# EAGLE board Adaptor485mini_MODIF_PT_ELECROW (EAGLE 6.5.0), part 1 of 2
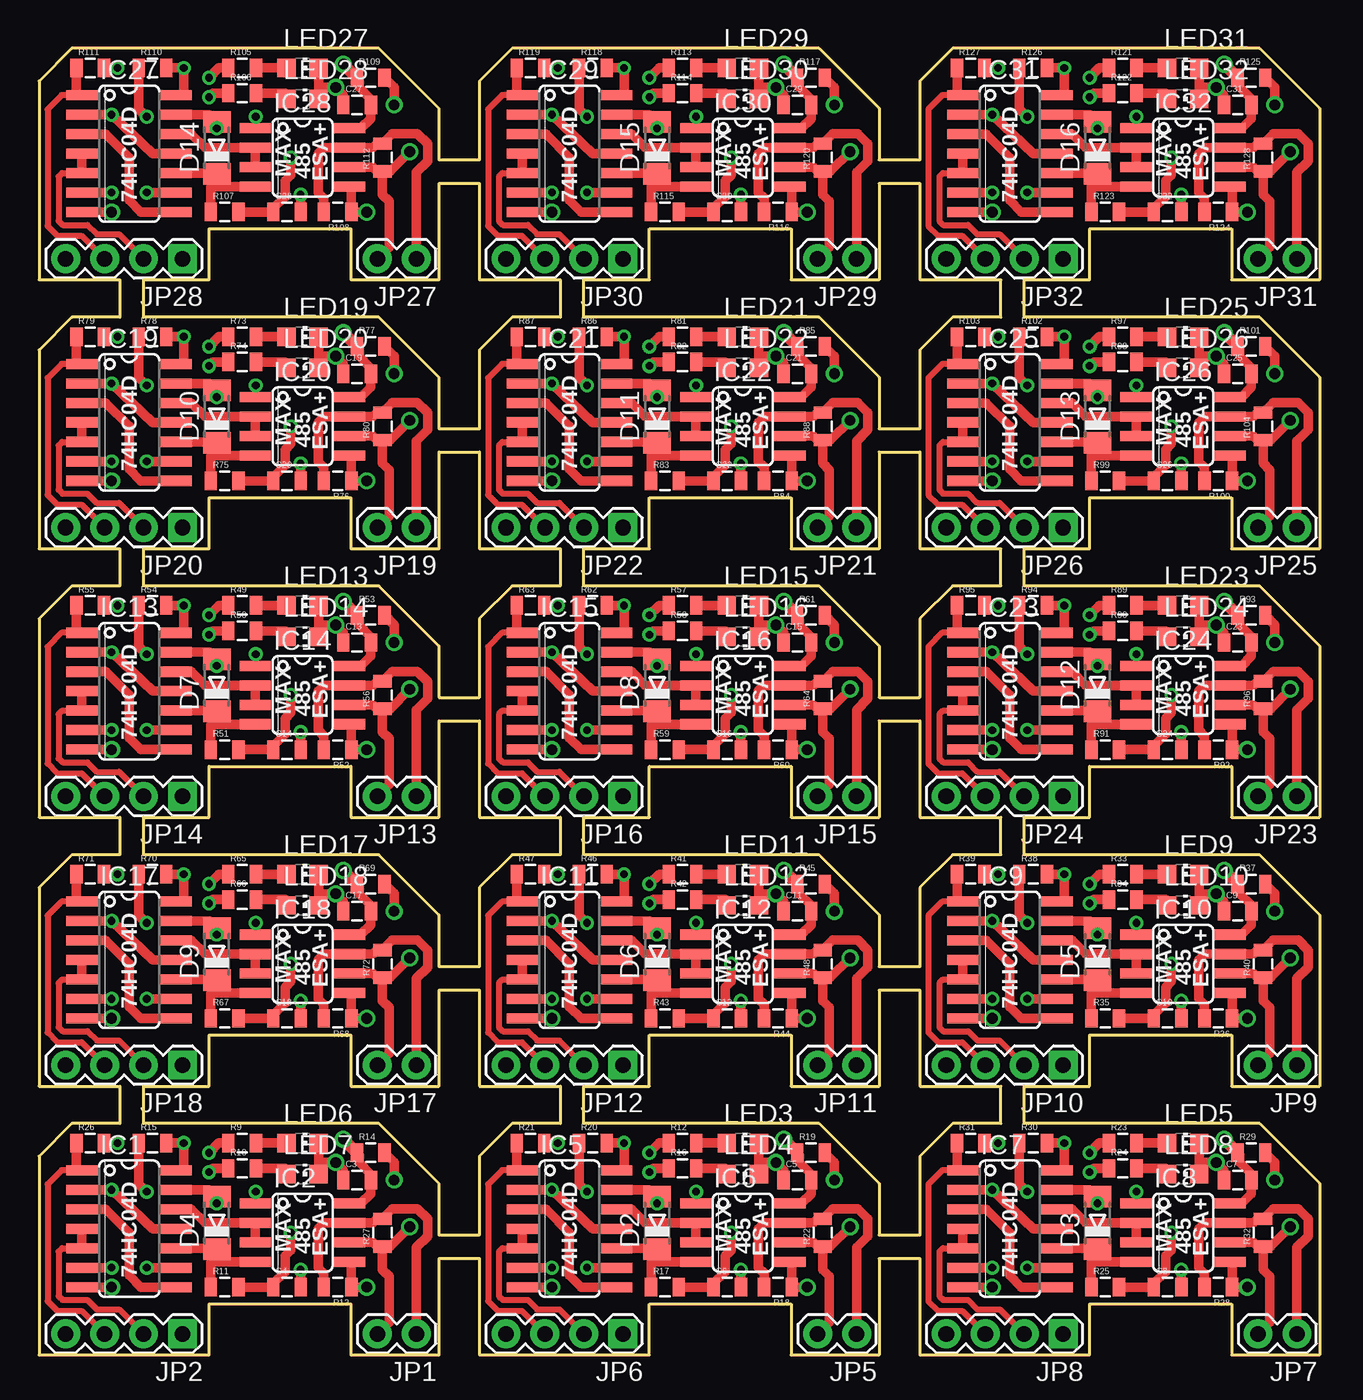
[diagram p0: board, top side]
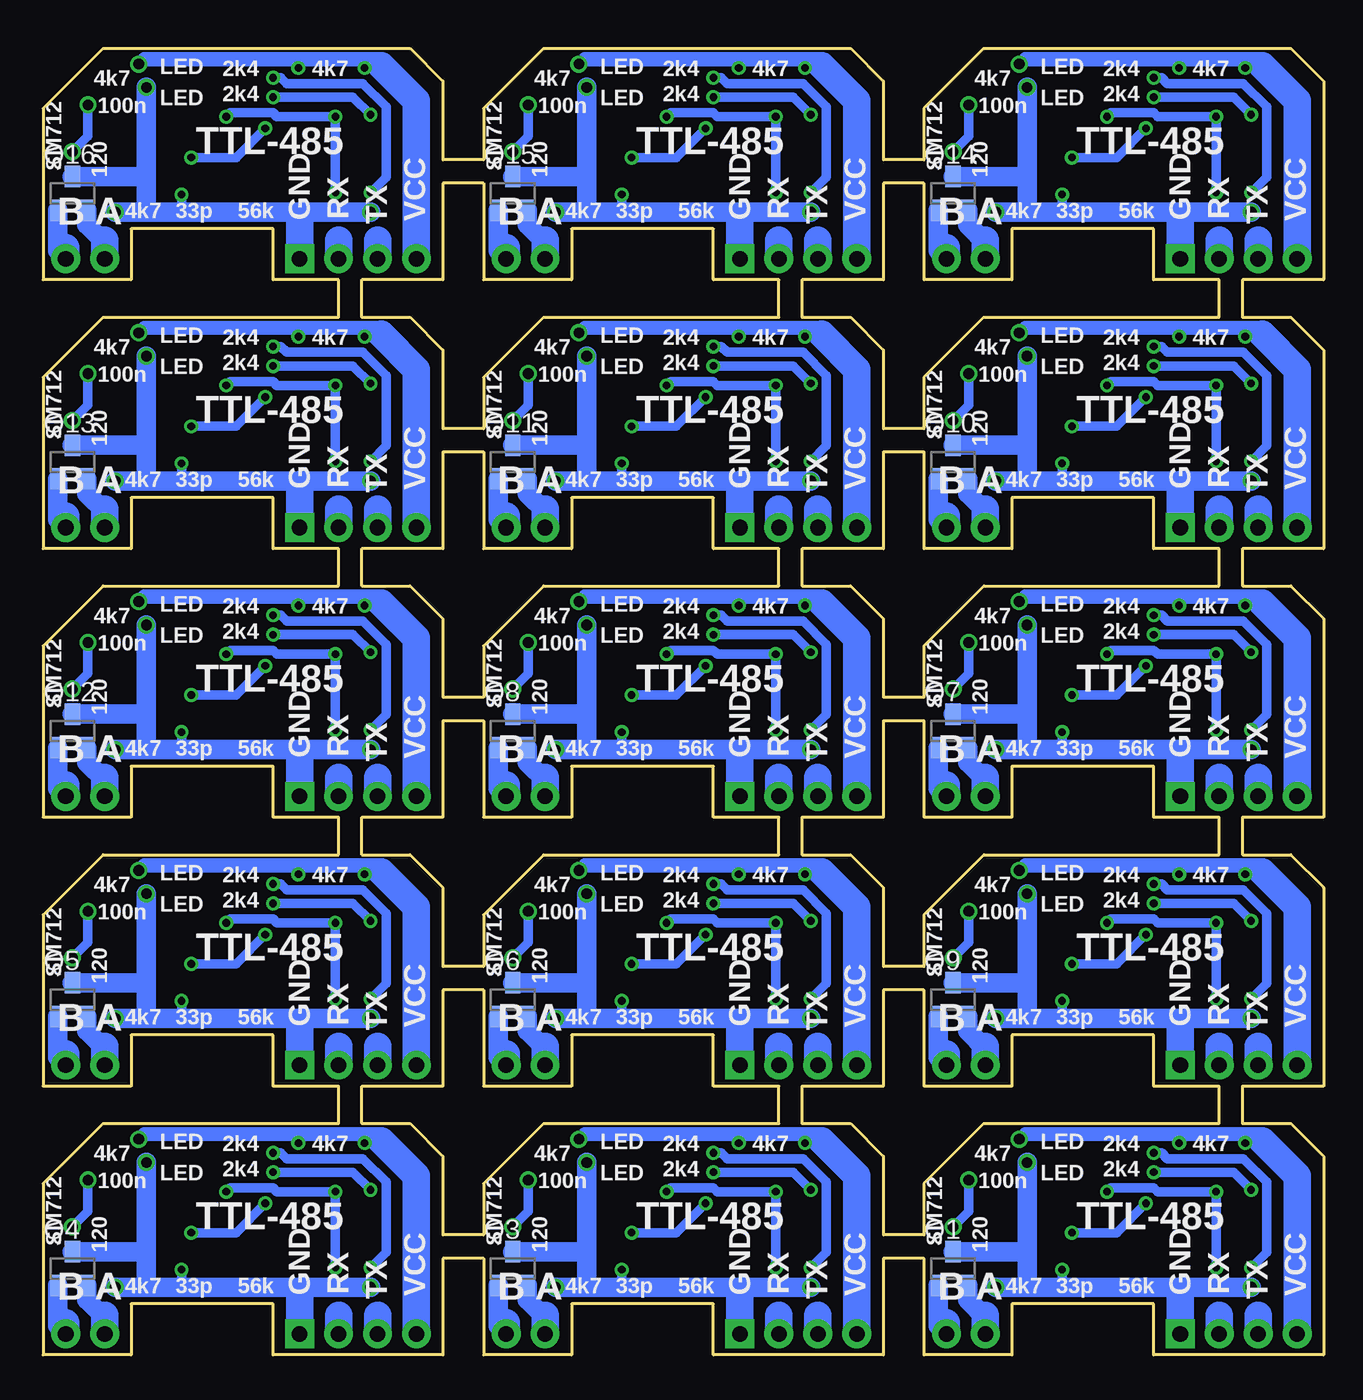
[diagram p1: board, bottom side, seen from below]

Size 83.46 x 85.19 mm. Coordinates in mm from the lower left corner, seen from the top.
Outline: 22.15,15.09 6.81,15.09 6.81,17.53 11.07,17.53 11.07,20.85 20.32,20.85 20.32,17.53 26.06,17.53 26.06,23.8 28.7,23.8 28.7,17.53 33.98,17.53 33.98,15.09 30.84,15.09 28.7,12.95 28.7,7.82 26.06,7.82 26.06,11.18 22.15,15.09
Outline: 5.28,15.09 2.13,15.09 0,12.95 0,0 11.07,0 11.07,3.33 20.32,3.33 20.32,0 26.06,0 26.06,6.3 28.7,6.3 28.7,0 39.78,0 39.78,3.33 49.02,3.33 49.02,0 54.76,0 54.76,6.3 57.4,6.3 57.4,0 68.48,0 68.48,3.33 77.72,3.33 77.72,0 83.46,0 83.46,11.18 79.55,15.09 64.21,15.09 64.21,17.53 68.48,17.53 68.48,20.85 77.72,20.85 77.72,17.53 83.46,17.53 83.46,28.7 79.55,32.61 64.21,32.61 64.21,35.05 68.48,35.05 68.48,38.38 77.72,38.38 77.72,35.05 83.46,35.05 83.46,46.23 79.55,50.14 64.21,50.14 64.21,52.58 68.48,52.58 68.48,55.91 77.72,55.91 77.72,52.58 83.46,52.58 83.46,63.75 79.55,67.67 64.21,67.67 64.21,70.1 68.48,70.1 68.48,73.43 77.72,73.43 77.72,70.1 83.46,70.1 83.46,81.28 79.55,85.19 59.54,85.19 57.4,83.06 57.4,77.93 54.76,77.93 54.76,81.28 50.85,85.19 30.84,85.19 28.7,83.06 28.7,77.93 26.06,77.93 26.06,81.28 22.15,85.19 2.13,85.19 0,83.06 0,70.1 5.28,70.1 5.28,67.67 2.13,67.67 0,65.53 0,52.58 5.28,52.58 5.28,50.14 2.13,50.14 0,48.01 0,35.05 5.28,35.05 5.28,32.61 2.13,32.61 0,30.48 0,17.53 5.28,17.53 5.28,15.09
Outline: 50.85,15.09 35.51,15.09 35.51,17.53 39.78,17.53 39.78,20.85 49.02,20.85 49.02,17.53 54.76,17.53 54.76,23.8 57.4,23.8 57.4,17.53 62.69,17.53 62.69,15.09 59.54,15.09 57.4,12.95 57.4,7.82 54.76,7.82 54.76,11.18 50.85,15.09
Outline: 62.69,32.61 59.54,32.61 57.4,30.48 57.4,25.32 54.76,25.32 54.76,28.7 50.85,32.61 35.51,32.61 35.51,35.05 39.78,35.05 39.78,38.38 49.02,38.38 49.02,35.05 54.76,35.05 54.76,41.35 57.4,41.35 57.4,35.05 62.69,35.05 62.69,32.61
Outline: 33.98,32.61 30.84,32.61 28.7,30.48 28.7,25.32 26.06,25.32 26.06,28.7 22.15,32.61 6.81,32.61 6.81,35.05 11.07,35.05 11.07,38.38 20.32,38.38 20.32,35.05 26.06,35.05 26.06,41.35 28.7,41.35 28.7,35.05 33.98,35.05 33.98,32.61
Outline: 22.15,50.14 6.81,50.14 6.81,52.58 11.07,52.58 11.07,55.91 20.32,55.91 20.32,52.58 26.06,52.58 26.06,58.88 28.7,58.88 28.7,52.58 33.98,52.58 33.98,50.14 30.84,50.14 28.7,48.01 28.7,42.88 26.06,42.88 26.06,46.23 22.15,50.14
Outline: 50.85,50.14 35.51,50.14 35.51,52.58 39.78,52.58 39.78,55.91 49.02,55.91 49.02,52.58 54.76,52.58 54.76,58.88 57.4,58.88 57.4,52.58 62.69,52.58 62.69,50.14 59.54,50.14 57.4,48.01 57.4,42.88 54.76,42.88 54.76,46.23 50.85,50.14
Outline: 22.15,67.67 6.81,67.67 6.81,70.1 11.07,70.1 11.07,73.43 20.32,73.43 20.32,70.1 26.06,70.1 26.06,76.4 28.7,76.4 28.7,70.1 33.98,70.1 33.98,67.67 30.84,67.67 28.7,65.53 28.7,60.4 26.06,60.4 26.06,63.75 22.15,67.67
Outline: 50.85,67.67 35.51,67.67 35.51,70.1 39.78,70.1 39.78,73.43 49.02,73.43 49.02,70.1 54.76,70.1 54.76,76.4 57.4,76.4 57.4,70.1 62.69,70.1 62.69,67.67 59.54,67.67 57.4,65.53 57.4,60.4 54.76,60.4 54.76,63.75 50.85,67.67
Copper layers (1*16): Top 0.035mm / dielectric 1.5mm / Bottom 0.035mm
Design rules "default *": minimum track width 10mil, minimum drill 24mil, track to track 8mil, track to pad 8mil, pad to pad 8mil, via to via 8mil, smd to smd 8mil, copper to edge 40mil, drill to drill 8mil, minimum pad ring 10mil, minimum via ring 8mil, stop-mask expansion 4mil, vias tented up to drill 24mil, thermal gap 10mil

## Footprints (pad centres in the part's own frame; a part is rotated, then mirrored left to right if it is on the bottom)
0805 = smd 0.8 x 1.2: 1 -0.9,0; 2 0.9,0
MINIMELF = smd 1.4 x 1.8: A 1.7,0; C -1.7,0
SO14 = smd 0.66 x 2.032: 1 -3.81,-3.073; 2 -2.54,-3.073; 3 -1.27,-3.073; 4 0,-3.073; 5 1.27,-3.073; 6 2.54,-3.073; 7 3.81,-3.073; 8 3.81,3.073; 9 2.54,3.073; 10 1.27,3.073; 11 0,3.073; 12 -1.27,3.073; 13 -2.54,3.073; 14 -3.81,3.073
SO08 = smd 0.66 x 2.032: 1 -1.905,-3.073; 2 -0.635,-3.073; 3 0.635,-3.073; 4 1.905,-3.073; 5 1.905,3.073; 6 0.635,3.073; 7 -0.635,3.073; 8 -1.905,3.073
1X02 = drill 1.016 pad 1.88: 1 0,0; 2 2.54,0
1X04 = drill 1.016 pad 1.88 square: 1 0,0 | drill 1.016 pad 1.88: 2 2.54,0; 3 5.08,0; 4 7.62,0
CHIP-LED0805 = smd 1.2 x 1.2: A 0,-1.05; C 0,1.05
SOT23 = smd 1 x 1.4: 1 -0.95,-1.1; 2 0.95,-1.1; 3 0,1.1

## Placement (x,y rotation side)
C3  100n  [0805]  20.73,11.4 0 top
C4  33pF  [0805]  16.15,4.42 0 top
C5  100n  [0805]  49.43,11.4 0 top
C6  33pF  [0805]  44.86,4.42 0 top
C7  100n  [0805]  78.13,11.4 0 top
C8  33pF  [0805]  73.56,4.42 0 top
C9  100n  [0805]  78.13,28.93 0 top
C10  33pF  [0805]  73.56,21.95 0 top
C11  100n  [0805]  49.43,28.93 0 top
C12  33pF  [0805]  44.86,21.95 0 top
C13  100n  [0805]  20.73,46.46 0 top
C14  33pF  [0805]  16.15,39.47 0 top
C15  100n  [0805]  49.43,46.46 0 top
C16  33pF  [0805]  44.86,39.47 0 top
C17  100n  [0805]  20.73,28.93 0 top
C18  33pF  [0805]  16.15,21.95 0 top
C19  100n  [0805]  20.73,63.98 0 top
C20  33pF  [0805]  16.15,57 0 top
C21  100n  [0805]  49.43,63.98 0 top
C22  33pF  [0805]  44.86,57 0 top
C23  100n  [0805]  78.13,46.46 0 top
C24  33pF  [0805]  73.56,39.47 0 top
C25  100n  [0805]  78.13,63.98 0 top
C26  33pF  [0805]  73.56,57 0 top
C27  100n  [0805]  20.73,81.51 0 top
C28  33pF  [0805]  16.15,74.52 0 top
C29  100n  [0805]  49.43,81.51 0 top
C30  33pF  [0805]  44.86,74.52 0 top
C31  100n  [0805]  78.13,81.51 0 top
C32  33pF  [0805]  73.56,74.52 0 top
D2  1N4148  [MINIMELF]  40.28,8.61 90 top
D3  1N4148  [MINIMELF]  68.99,8.61 90 top
D4  1N4148  [MINIMELF]  11.58,8.61 90 top
D5  1N4148  [MINIMELF]  68.99,26.14 90 top
D6  1N4148  [MINIMELF]  40.28,26.14 90 top
D7  1N4148  [MINIMELF]  11.58,43.66 90 top
D8  1N4148  [MINIMELF]  40.28,43.66 90 top
D9  1N4148  [MINIMELF]  11.58,26.14 90 top
D10  1N4148  [MINIMELF]  11.58,61.19 90 top
D11  1N4148  [MINIMELF]  40.28,61.19 90 top
D12  1N4148  [MINIMELF]  68.99,43.66 90 top
D13  1N4148  [MINIMELF]  68.99,61.19 90 top
D14  1N4148  [MINIMELF]  11.58,78.71 90 top
D15  1N4148  [MINIMELF]  40.28,78.71 90 top
D16  1N4148  [MINIMELF]  68.99,78.71 90 top
IC1  74HC04D  [SO14]  5.87,8.23 270 top
IC2  MAX3468CSA  [SO08]  17.17,7.98 270 top
IC5  74HC04D  [SO14]  34.57,8.23 270 top
IC6  MAX3468CSA  [SO08]  45.87,7.98 270 top
IC7  74HC04D  [SO14]  63.27,8.23 270 top
IC8  MAX3468CSA  [SO08]  74.57,7.98 270 top
IC9  74HC04D  [SO14]  63.27,25.76 270 top
IC10  MAX3468CSA  [SO08]  74.57,25.5 270 top
IC11  74HC04D  [SO14]  34.57,25.76 270 top
IC12  MAX3468CSA  [SO08]  45.87,25.5 270 top
IC13  74HC04D  [SO14]  5.87,43.28 270 top
IC14  MAX3468CSA  [SO08]  17.17,43.03 270 top
IC15  74HC04D  [SO14]  34.57,43.28 270 top
IC16  MAX3468CSA  [SO08]  45.87,43.03 270 top
IC17  74HC04D  [SO14]  5.87,25.76 270 top
IC18  MAX3468CSA  [SO08]  17.17,25.5 270 top
IC19  74HC04D  [SO14]  5.87,60.81 270 top
IC20  MAX3468CSA  [SO08]  17.17,60.55 270 top
IC21  74HC04D  [SO14]  34.57,60.81 270 top
IC22  MAX3468CSA  [SO08]  45.87,60.55 270 top
IC23  74HC04D  [SO14]  63.27,43.28 270 top
IC24  MAX3468CSA  [SO08]  74.57,43.03 270 top
IC25  74HC04D  [SO14]  63.27,60.81 270 top
IC26  MAX3468CSA  [SO08]  74.57,60.55 270 top
IC27  74HC04D  [SO14]  5.87,78.33 270 top
IC28  MAX3468CSA  [SO08]  17.17,78.08 270 top
IC29  74HC04D  [SO14]  34.57,78.33 270 top
IC30  MAX3468CSA  [SO08]  45.87,78.08 270 top
IC31  74HC04D  [SO14]  63.27,78.33 270 top
IC32  MAX3468CSA  [SO08]  74.57,78.08 270 top
JP1  [1X02]  24.59,1.37 180 top
JP2  [1X04]  9.35,1.37 180 top
JP5  [1X02]  53.29,1.37 180 top
JP6  [1X04]  38.05,1.37 180 top
JP7  [1X02]  81.99,1.37 180 top
JP8  [1X04]  66.75,1.37 180 top
JP9  [1X02]  81.99,18.9 180 top
JP10  [1X04]  66.75,18.9 180 top
JP11  [1X02]  53.29,18.9 180 top
JP12  [1X04]  38.05,18.9 180 top
JP13  [1X02]  24.59,36.42 180 top
JP14  [1X04]  9.35,36.42 180 top
JP15  [1X02]  53.29,36.42 180 top
JP16  [1X04]  38.05,36.42 180 top
JP17  [1X02]  24.59,18.9 180 top
JP18  [1X04]  9.35,18.9 180 top
JP19  [1X02]  24.59,53.95 180 top
JP20  [1X04]  9.35,53.95 180 top
JP21  [1X02]  53.29,53.95 180 top
JP22  [1X04]  38.05,53.95 180 top
JP23  [1X02]  81.99,36.42 180 top
JP24  [1X04]  66.75,36.42 180 top
JP25  [1X02]  81.99,53.95 180 top
JP26  [1X04]  66.75,53.95 180 top
JP27  [1X02]  24.59,71.48 180 top
JP28  [1X04]  9.35,71.48 180 top
JP29  [1X02]  53.29,71.48 180 top
JP30  [1X04]  38.05,71.48 180 top
JP31  [1X02]  81.99,71.48 180 top
JP32  [1X04]  66.75,71.48 180 top
LED3  [CHIP-LED0805]  45.87,13.82 270 top
LED4  [CHIP-LED0805]  45.87,11.79 270 top
LED5  [CHIP-LED0805]  74.57,13.82 270 top
LED6  [CHIP-LED0805]  17.17,13.82 270 top
LED7  [CHIP-LED0805]  17.17,11.79 270 top
LED8  [CHIP-LED0805]  74.57,11.79 270 top
LED9  [CHIP-LED0805]  74.57,31.34 270 top
LED10  [CHIP-LED0805]  74.57,29.31 270 top
LED11  [CHIP-LED0805]  45.87,31.34 270 top
LED12  [CHIP-LED0805]  45.87,29.31 270 top
LED13  [CHIP-LED0805]  17.17,48.87 270 top
LED14  [CHIP-LED0805]  17.17,46.84 270 top
LED15  [CHIP-LED0805]  45.87,48.87 270 top
LED16  [CHIP-LED0805]  45.87,46.84 270 top
LED17  [CHIP-LED0805]  17.17,31.34 270 top
LED18  [CHIP-LED0805]  17.17,29.31 270 top
LED19  [CHIP-LED0805]  17.17,66.4 270 top
LED20  [CHIP-LED0805]  17.17,64.36 270 top
LED21  [CHIP-LED0805]  45.87,66.4 270 top
LED22  [CHIP-LED0805]  45.87,64.36 270 top
LED23  [CHIP-LED0805]  74.57,48.87 270 top
LED24  [CHIP-LED0805]  74.57,46.84 270 top
LED25  [CHIP-LED0805]  74.57,66.4 270 top
LED26  [CHIP-LED0805]  74.57,64.36 270 top
LED27  [CHIP-LED0805]  17.17,83.92 270 top
LED28  [CHIP-LED0805]  17.17,81.89 270 top
LED29  [CHIP-LED0805]  45.87,83.92 270 top
LED30  [CHIP-LED0805]  45.87,81.89 270 top
LED31  [CHIP-LED0805]  74.57,83.92 270 top
LED32  [CHIP-LED0805]  74.57,81.89 270 top
Q1  BCX70SMD  [SOT23]  24.16,5.64 0 bottom
Q3  BCX70SMD  [SOT23]  52.86,5.64 0 bottom
Q4  BCX70SMD  [SOT23]  81.56,5.64 0 bottom
Q5  BCX70SMD  [SOT23]  81.56,23.16 0 bottom
Q6  BCX70SMD  [SOT23]  52.86,23.16 0 bottom
Q7  BCX70SMD  [SOT23]  24.16,40.69 0 bottom
Q8  BCX70SMD  [SOT23]  52.86,40.69 0 bottom
Q9  BCX70SMD  [SOT23]  24.16,23.16 0 bottom
Q10  BCX70SMD  [SOT23]  24.16,58.22 0 bottom
Q11  BCX70SMD  [SOT23]  52.86,58.22 0 bottom
Q12  BCX70SMD  [SOT23]  81.56,40.69 0 bottom
Q13  BCX70SMD  [SOT23]  81.56,58.22 0 bottom
Q14  BCX70SMD  [SOT23]  24.16,75.74 0 bottom
Q15  BCX70SMD  [SOT23]  52.86,75.74 0 bottom
Q16  BCX70SMD  [SOT23]  81.56,75.74 0 bottom
R9  2K4  [0805]  13.23,13.82 0 top
R10  2K4  [0805]  13.23,12.17 0 top
R11  56K  [0805]  12.09,4.42 0 top
R12  2K4  [0805]  41.94,13.82 0 top
R13  4K7  [0805]  19.46,4.42 180 top
R14  4K7  [0805]  21.62,13.18 0 top
R15  4K7  [0805]  7.39,13.82 0 top
R16  2K4  [0805]  41.94,12.17 0 top
R17  56K  [0805]  40.79,4.42 0 top
R18  4K7  [0805]  48.16,4.42 180 top
R19  4K7  [0805]  50.32,13.18 0 top
R20  4K7  [0805]  36.09,13.82 0 top
R21  4K7  [0805]  32.03,13.82 0 top
R22  120  [0805]  51.08,7.98 90 top
R23  2K4  [0805]  70.64,13.82 0 top
R24  2K4  [0805]  70.64,12.17 0 top
R25  56K  [0805]  69.49,4.42 0 top
R26  4K7  [0805]  3.33,13.82 0 top
R27  120  [0805]  22.38,7.98 90 top
R28  4K7  [0805]  76.86,4.42 180 top
R29  4K7  [0805]  79.02,13.18 0 top
R30  4K7  [0805]  64.8,13.82 0 top
R31  4K7  [0805]  60.73,13.82 0 top
R32  120  [0805]  79.78,7.98 90 top
R33  2K4  [0805]  70.64,31.34 0 top
R34  2K4  [0805]  70.64,29.69 0 top
R35  56K  [0805]  69.49,21.95 0 top
R36  4K7  [0805]  76.86,21.95 180 top
R37  4K7  [0805]  79.02,30.71 0 top
R38  4K7  [0805]  64.8,31.34 0 top
R39  4K7  [0805]  60.73,31.34 0 top
R40  120  [0805]  79.78,25.5 90 top
R41  2K4  [0805]  41.94,31.34 0 top
R42  2K4  [0805]  41.94,29.69 0 top
R43  56K  [0805]  40.79,21.95 0 top
R44  4K7  [0805]  48.16,21.95 180 top
R45  4K7  [0805]  50.32,30.71 0 top
R46  4K7  [0805]  36.09,31.34 0 top
R47  4K7  [0805]  32.03,31.34 0 top
R48  120  [0805]  51.08,25.5 90 top
R49  2K4  [0805]  13.23,48.87 0 top
R50  2K4  [0805]  13.23,47.22 0 top
R51  56K  [0805]  12.09,39.47 0 top
R52  4K7  [0805]  19.46,39.47 180 top
R53  4K7  [0805]  21.62,48.23 0 top
R54  4K7  [0805]  7.39,48.87 0 top
R55  4K7  [0805]  3.33,48.87 0 top
R56  120  [0805]  22.38,43.03 90 top
R57  2K4  [0805]  41.94,48.87 0 top
R58  2K4  [0805]  41.94,47.22 0 top
R59  56K  [0805]  40.79,39.47 0 top
R60  4K7  [0805]  48.16,39.47 180 top
R61  4K7  [0805]  50.32,48.23 0 top
R62  4K7  [0805]  36.09,48.87 0 top
R63  4K7  [0805]  32.03,48.87 0 top
R64  120  [0805]  51.08,43.03 90 top
R65  2K4  [0805]  13.23,31.34 0 top
R66  2K4  [0805]  13.23,29.69 0 top
R67  56K  [0805]  12.09,21.95 0 top
R68  4K7  [0805]  19.46,21.95 180 top
R69  4K7  [0805]  21.62,30.71 0 top
R70  4K7  [0805]  7.39,31.34 0 top
R71  4K7  [0805]  3.33,31.34 0 top
R72  120  [0805]  22.38,25.5 90 top
R73  2K4  [0805]  13.23,66.4 0 top
R74  2K4  [0805]  13.23,64.74 0 top
R75  56K  [0805]  12.09,57 0 top
R76  4K7  [0805]  19.46,57 180 top
R77  4K7  [0805]  21.62,65.76 0 top
R78  4K7  [0805]  7.39,66.4 0 top
R79  4K7  [0805]  3.33,66.4 0 top
R80  120  [0805]  22.38,60.55 90 top
R81  2K4  [0805]  41.94,66.4 0 top
R82  2K4  [0805]  41.94,64.74 0 top
R83  56K  [0805]  40.79,57 0 top
R84  4K7  [0805]  48.16,57 180 top
R85  4K7  [0805]  50.32,65.76 0 top
R86  4K7  [0805]  36.09,66.4 0 top
R87  4K7  [0805]  32.03,66.4 0 top
R88  120  [0805]  51.08,60.55 90 top
R89  2K4  [0805]  70.64,48.87 0 top
R90  2K4  [0805]  70.64,47.22 0 top
R91  56K  [0805]  69.49,39.47 0 top
R92  4K7  [0805]  76.86,39.47 180 top
R93  4K7  [0805]  79.02,48.23 0 top
R94  4K7  [0805]  64.8,48.87 0 top
R95  4K7  [0805]  60.73,48.87 0 top
R96  120  [0805]  79.78,43.03 90 top
R97  2K4  [0805]  70.64,66.4 0 top
R98  2K4  [0805]  70.64,64.74 0 top
R99  56K  [0805]  69.49,57 0 top
R100  4K7  [0805]  76.86,57 180 top
R101  4K7  [0805]  79.02,65.76 0 top
R102  4K7  [0805]  64.8,66.4 0 top
R103  4K7  [0805]  60.73,66.4 0 top
R104  120  [0805]  79.78,60.55 90 top
R105  2K4  [0805]  13.23,83.92 0 top
R106  2K4  [0805]  13.23,82.27 0 top
R107  56K  [0805]  12.09,74.52 0 top
R108  4K7  [0805]  19.46,74.52 180 top
R109  4K7  [0805]  21.62,83.29 0 top
R110  4K7  [0805]  7.39,83.92 0 top
R111  4K7  [0805]  3.33,83.92 0 top
R112  120  [0805]  22.38,78.08 90 top
R113  2K4  [0805]  41.94,83.92 0 top
R114  2K4  [0805]  41.94,82.27 0 top
R115  56K  [0805]  40.79,74.52 0 top
R116  4K7  [0805]  48.16,74.52 180 top
R117  4K7  [0805]  50.32,83.29 0 top
R118  4K7  [0805]  36.09,83.92 0 top
R119  4K7  [0805]  32.03,83.92 0 top
R120  120  [0805]  51.08,78.08 90 top
R121  2K4  [0805]  70.64,83.92 0 top
R122  2K4  [0805]  70.64,82.27 0 top
R123  56K  [0805]  69.49,74.52 0 top
R124  4K7  [0805]  76.86,74.52 180 top
R125  4K7  [0805]  79.02,83.29 0 top
R126  4K7  [0805]  64.8,83.92 0 top
R127  4K7  [0805]  60.73,83.92 0 top
R128  120  [0805]  79.78,78.08 90 top

## Library data of the parts
C3-C32 R9-R128 = SparkFun-Passives
D2-D16 = diode
IC1 IC5 IC7 IC9 IC11 IC13 IC15 IC17 IC19 IC21 IC23 IC25 IC27 IC29 IC31 = 74xx-eu
IC2 IC6 IC8 IC10 IC12 IC14 IC16 IC18 IC20 IC22 IC24 IC26 IC28 IC30 IC32 = maxim; MPN: MAX3468CSA+; OC_FARNELL: unknown; OC_NEWARK: 76K6721
JP1 JP2 JP5-JP32 = SparkFun-Connectors
LED3-LED32 = led
Q1 Q3-Q16 = transistor-npn

## Nets
3.3V: C3.2 IC1.14 IC2.8 JP2.4 R14.1 R15.2 R26.2
3.3V2: C5.2 IC5.14 IC6.8 JP6.4 R19.1 R20.2 R21.2
3.3V3: C7.2 IC7.14 IC8.8 JP8.4 R29.1 R30.2 R31.2
3.3V4: C9.2 IC9.14 IC10.8 JP10.4 R37.1 R38.2 R39.2
3.3V5: C11.2 IC11.14 IC12.8 JP12.4 R45.1 R46.2 R47.2
3.3V6: C13.2 IC13.14 IC14.8 JP14.4 R53.1 R54.2 R55.2
3.3V7: C15.2 IC15.14 IC16.8 JP16.4 R61.1 R62.2 R63.2
3.3V8: C17.2 IC17.14 IC18.8 JP18.4 R69.1 R70.2 R71.2
3.3V9: C19.2 IC19.14 IC20.8 JP20.4 R77.1 R78.2 R79.2
3.3V10: C21.2 IC21.14 IC22.8 JP22.4 R85.1 R86.2 R87.2
3.3V11: C23.2 IC23.14 IC24.8 JP24.4 R93.1 R94.2 R95.2
3.3V12: C25.2 IC25.14 IC26.8 JP26.4 R101.1 R102.2 R103.2
3.3V13: C27.2 IC27.14 IC28.8 JP28.4 R109.1 R110.2 R111.2
3.3V14: C29.2 IC29.14 IC30.8 JP30.4 R117.1 R118.2 R119.2
3.3V15: C31.2 IC31.14 IC32.8 JP32.4 R125.1 R126.2 R127.2
A+: IC2.6 JP1.2 Q1.2 R14.2 R27.1
A+2: IC6.6 JP5.2 Q3.2 R19.2 R22.1
A+3: IC8.6 JP7.2 Q4.2 R29.2 R32.1
A+4: IC10.6 JP9.2 Q5.2 R37.2 R40.1
A+5: IC12.6 JP11.2 Q6.2 R45.2 R48.1
A+6: IC14.6 JP13.2 Q7.2 R53.2 R56.1
A+7: IC16.6 JP15.2 Q8.2 R61.2 R64.1
A+8: IC18.6 JP17.2 Q9.2 R69.2 R72.1
A+9: IC20.6 JP19.2 Q10.2 R77.2 R80.1
A+10: IC22.6 JP21.2 Q11.2 R85.2 R88.1
A+11: IC24.6 JP23.2 Q12.2 R93.2 R96.1
A+12: IC26.6 JP25.2 Q13.2 R101.2 R104.1
A+13: IC28.6 JP27.2 Q14.2 R109.2 R112.1
A+14: IC30.6 JP29.2 Q15.2 R117.2 R120.1
A+15: IC32.6 JP31.2 Q16.2 R125.2 R128.1
B-: IC2.7 JP1.1 Q1.1 R13.2 R27.2
B-2: IC6.7 JP5.1 Q3.1 R18.2 R22.2
B-3: IC8.7 JP7.1 Q4.1 R28.2 R32.2
B-4: IC10.7 JP9.1 Q5.1 R36.2 R40.2
B-5: IC12.7 JP11.1 Q6.1 R44.2 R48.2
B-6: IC14.7 JP13.1 Q7.1 R52.2 R56.2
B-7: IC16.7 JP15.1 Q8.1 R60.2 R64.2
B-8: IC18.7 JP17.1 Q9.1 R68.2 R72.2
B-9: IC20.7 JP19.1 Q10.1 R76.2 R80.2
B-10: IC22.7 JP21.1 Q11.1 R84.2 R88.2
B-11: IC24.7 JP23.1 Q12.1 R92.2 R96.2
B-12: IC26.7 JP25.1 Q13.1 R100.2 R104.2
B-13: IC28.7 JP27.1 Q14.1 R108.2 R112.2
B-14: IC30.7 JP29.1 Q15.1 R116.2 R120.2
B-15: IC32.7 JP31.1 Q16.1 R124.2 R128.2
GND: C3.1 C4.2 IC1.7 IC2.5 JP2.1 LED6.C LED7.C Q1.3 R13.1
GND3: C5.1 C6.2 IC5.7 IC6.5 JP6.1 LED3.C LED4.C Q3.3 R18.1
GND4: C7.1 C8.2 IC7.7 IC8.5 JP8.1 LED5.C LED8.C Q4.3 R28.1
GND5: C9.1 C10.2 IC9.7 IC10.5 JP10.1 LED9.C LED10.C Q5.3 R36.1
GND6: C11.1 C12.2 IC11.7 IC12.5 JP12.1 LED11.C LED12.C Q6.3 R44.1
GND7: C13.1 C14.2 IC13.7 IC14.5 JP14.1 LED13.C LED14.C Q7.3 R52.1
GND8: C15.1 C16.2 IC15.7 IC16.5 JP16.1 LED15.C LED16.C Q8.3 R60.1
GND9: C17.1 C18.2 IC17.7 IC18.5 JP18.1 LED17.C LED18.C Q9.3 R68.1
GND10: C19.1 C20.2 IC19.7 IC20.5 JP20.1 LED19.C LED20.C Q10.3 R76.1
GND11: C21.1 C22.2 IC21.7 IC22.5 JP22.1 LED21.C LED22.C Q11.3 R84.1
GND12: C23.1 C24.2 IC23.7 IC24.5 JP24.1 LED23.C LED24.C Q12.3 R92.1
GND13: C25.1 C26.2 IC25.7 IC26.5 JP26.1 LED25.C LED26.C Q13.3 R100.1
GND14: C27.1 C28.2 IC27.7 IC28.5 JP28.1 LED27.C LED28.C Q14.3 R108.1
GND15: C29.1 C30.2 IC29.7 IC30.5 JP30.1 LED29.C LED30.C Q15.3 R116.1
GND16: C31.1 C32.2 IC31.7 IC32.5 JP32.1 LED31.C LED32.C Q16.3 R124.1
N$10: IC5.9 IC6.1 R20.1
N$11: IC5.3 IC5.8
N$12: C6.1 D2.A IC5.13 R17.2
N$13: IC5.6 R12.1
N$14: D2.C IC5.10 IC6.4 R17.1
N$15: IC5.12 IC6.2 IC6.3
N$16: LED7.A R10.2
N$17: LED6.A R9.2
N$18: LED4.A R16.2
N$19: IC1.2 IC1.11 R10.1
N$20: LED3.A R12.2
N$21: IC1.9 IC2.1 R15.1
N$22: IC5.2 IC5.11 R16.1
N$23: IC1.3 IC1.8
N$24: C4.1 D4.A IC1.13 R11.2
N$25: IC7.9 IC8.1 R30.1
N$26: IC7.3 IC7.8
N$27: IC1.6 R9.1
N$28: C8.1 D3.A IC7.13 R25.2
N$29: D4.C IC1.10 IC2.4 R11.1
N$30: IC1.12 IC2.2 IC2.3
N$31: IC7.6 R23.1
N$32: D3.C IC7.10 IC8.4 R25.1
N$33: IC7.12 IC8.2 IC8.3
N$34: LED8.A R24.2
N$35: LED5.A R23.2
N$36: IC7.2 IC7.11 R24.1
N$37: IC9.9 IC10.1 R38.1
N$38: IC9.3 IC9.8
N$39: C10.1 D5.A IC9.13 R35.2
N$40: IC9.6 R33.1
N$41: D5.C IC9.10 IC10.4 R35.1
N$42: IC9.12 IC10.2 IC10.3
N$43: LED10.A R34.2
N$44: LED9.A R33.2
N$45: IC9.2 IC9.11 R34.1
N$46: IC11.9 IC12.1 R46.1
N$47: IC11.3 IC11.8
N$48: C12.1 D6.A IC11.13 R43.2
N$49: IC11.6 R41.1
N$50: D6.C IC11.10 IC12.4 R43.1
N$51: IC11.12 IC12.2 IC12.3
N$52: LED12.A R42.2
N$53: LED11.A R41.2
N$54: IC11.2 IC11.11 R42.1
N$55: IC13.9 IC14.1 R54.1
N$56: IC13.3 IC13.8
N$57: C14.1 D7.A IC13.13 R51.2
N$58: IC13.6 R49.1
N$59: D7.C IC13.10 IC14.4 R51.1
N$60: IC13.12 IC14.2 IC14.3
N$61: LED14.A R50.2
N$62: LED13.A R49.2
N$63: IC13.2 IC13.11 R50.1
N$64: IC15.9 IC16.1 R62.1
N$65: IC15.3 IC15.8
N$66: C16.1 D8.A IC15.13 R59.2
N$67: IC15.6 R57.1
N$68: D8.C IC15.10 IC16.4 R59.1
N$69: IC15.12 IC16.2 IC16.3
N$70: LED16.A R58.2
N$71: LED15.A R57.2
N$72: IC15.2 IC15.11 R58.1
N$73: IC17.9 IC18.1 R70.1
N$74: IC17.3 IC17.8
N$75: C18.1 D9.A IC17.13 R67.2
N$76: IC17.6 R65.1
N$77: D9.C IC17.10 IC18.4 R67.1
N$78: IC17.12 IC18.2 IC18.3
N$79: LED18.A R66.2
N$80: LED17.A R65.2
N$81: IC17.2 IC17.11 R66.1
N$82: IC19.9 IC20.1 R78.1
N$83: IC19.3 IC19.8
N$84: C20.1 D10.A IC19.13 R75.2
N$85: IC19.6 R73.1
N$86: D10.C IC19.10 IC20.4 R75.1
N$87: IC19.12 IC20.2 IC20.3
N$88: LED20.A R74.2
N$89: LED19.A R73.2
N$90: IC19.2 IC19.11 R74.1
N$91: IC21.9 IC22.1 R86.1
N$92: IC21.3 IC21.8
N$93: C22.1 D11.A IC21.13 R83.2
N$94: IC21.6 R81.1
N$95: D11.C IC21.10 IC22.4 R83.1
N$96: IC21.12 IC22.2 IC22.3
N$97: LED22.A R82.2
N$98: LED21.A R81.2
N$99: IC21.2 IC21.11 R82.1
N$100: IC23.9 IC24.1 R94.1
N$101: IC23.3 IC23.8
N$102: C24.1 D12.A IC23.13 R91.2
N$103: IC23.6 R89.1
N$104: D12.C IC23.10 IC24.4 R91.1
N$105: IC23.12 IC24.2 IC24.3
N$106: LED24.A R90.2
N$107: LED23.A R89.2
N$108: IC23.2 IC23.11 R90.1
N$109: IC25.9 IC26.1 R102.1
N$110: IC25.3 IC25.8
N$111: C26.1 D13.A IC25.13 R99.2
N$112: IC25.6 R97.1
N$113: D13.C IC25.10 IC26.4 R99.1
N$114: IC25.12 IC26.2 IC26.3
N$115: LED26.A R98.2
N$116: LED25.A R97.2
N$117: IC25.2 IC25.11 R98.1
N$118: IC27.9 IC28.1 R110.1
N$119: IC27.3 IC27.8
N$120: C28.1 D14.A IC27.13 R107.2
N$121: IC27.6 R105.1
N$122: D14.C IC27.10 IC28.4 R107.1
N$123: IC27.12 IC28.2 IC28.3
N$124: LED28.A R106.2
N$125: LED27.A R105.2
N$126: IC27.2 IC27.11 R106.1
N$127: IC29.9 IC30.1 R118.1
N$128: IC29.3 IC29.8
N$129: C30.1 D15.A IC29.13 R115.2
N$130: IC29.6 R113.1
N$131: D15.C IC29.10 IC30.4 R115.1
N$132: IC29.12 IC30.2 IC30.3
N$133: LED30.A R114.2
N$134: LED29.A R113.2
N$135: IC29.2 IC29.11 R114.1
N$136: IC31.9 IC32.1 R126.1
N$137: IC31.3 IC31.8
N$138: C32.1 D16.A IC31.13 R123.2
N$139: IC31.6 R121.1
N$140: D16.C IC31.10 IC32.4 R123.1
N$141: IC31.12 IC32.2 IC32.3
N$142: LED32.A R122.2
N$143: LED31.A R121.2
N$144: IC31.2 IC31.11 R122.1
RX: IC1.1 JP2.3 R26.1
RX2: IC5.1 JP6.3 R21.1
RX3: IC7.1 JP8.3 R31.1
RX4: IC9.1 JP10.3 R39.1
RX5: IC11.1 JP12.3 R47.1
RX6: IC13.1 JP14.3 R55.1
RX7: IC15.1 JP16.3 R63.1
RX8: IC17.1 JP18.3 R71.1
RX9: IC19.1 JP20.3 R79.1
RX10: IC21.1 JP22.3 R87.1
RX11: IC23.1 JP24.3 R95.1
RX12: IC25.1 JP26.3 R103.1
RX13: IC27.1 JP28.3 R111.1
RX14: IC29.1 JP30.3 R119.1
RX15: IC31.1 JP32.3 R127.1
TX: IC1.4 IC1.5 JP2.2
TX2: IC5.4 IC5.5 JP6.2
TX3: IC7.4 IC7.5 JP8.2
TX4: IC9.4 IC9.5 JP10.2
TX5: IC11.4 IC11.5 JP12.2
TX6: IC13.4 IC13.5 JP14.2
TX7: IC15.4 IC15.5 JP16.2
TX8: IC17.4 IC17.5 JP18.2
TX9: IC19.4 IC19.5 JP20.2
TX10: IC21.4 IC21.5 JP22.2
TX11: IC23.4 IC23.5 JP24.2
TX12: IC25.4 IC25.5 JP26.2
TX13: IC27.4 IC27.5 JP28.2
TX14: IC29.4 IC29.5 JP30.2
TX15: IC31.4 IC31.5 JP32.2